# EAGLE board Modul PCB_denganJumper (EAGLE 9.6.2)
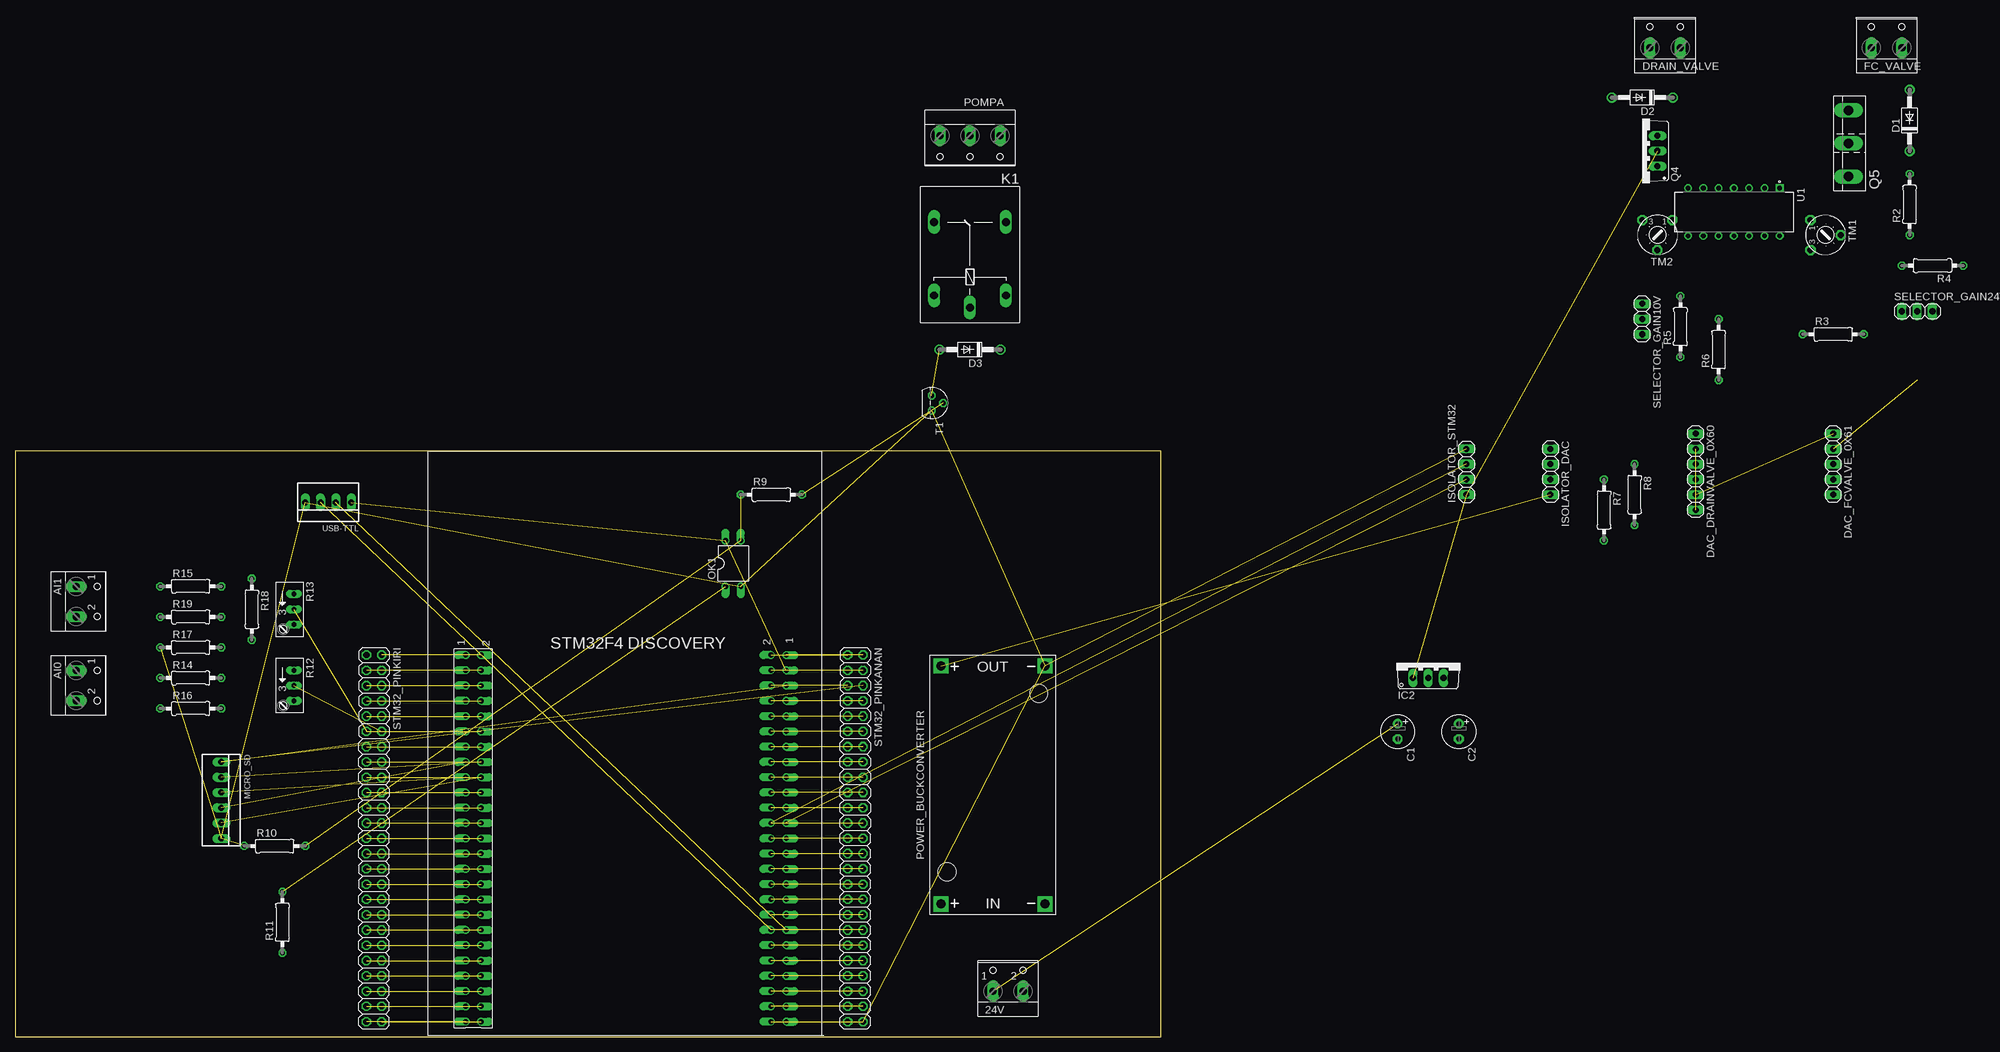
[diagram p0: board, top side]
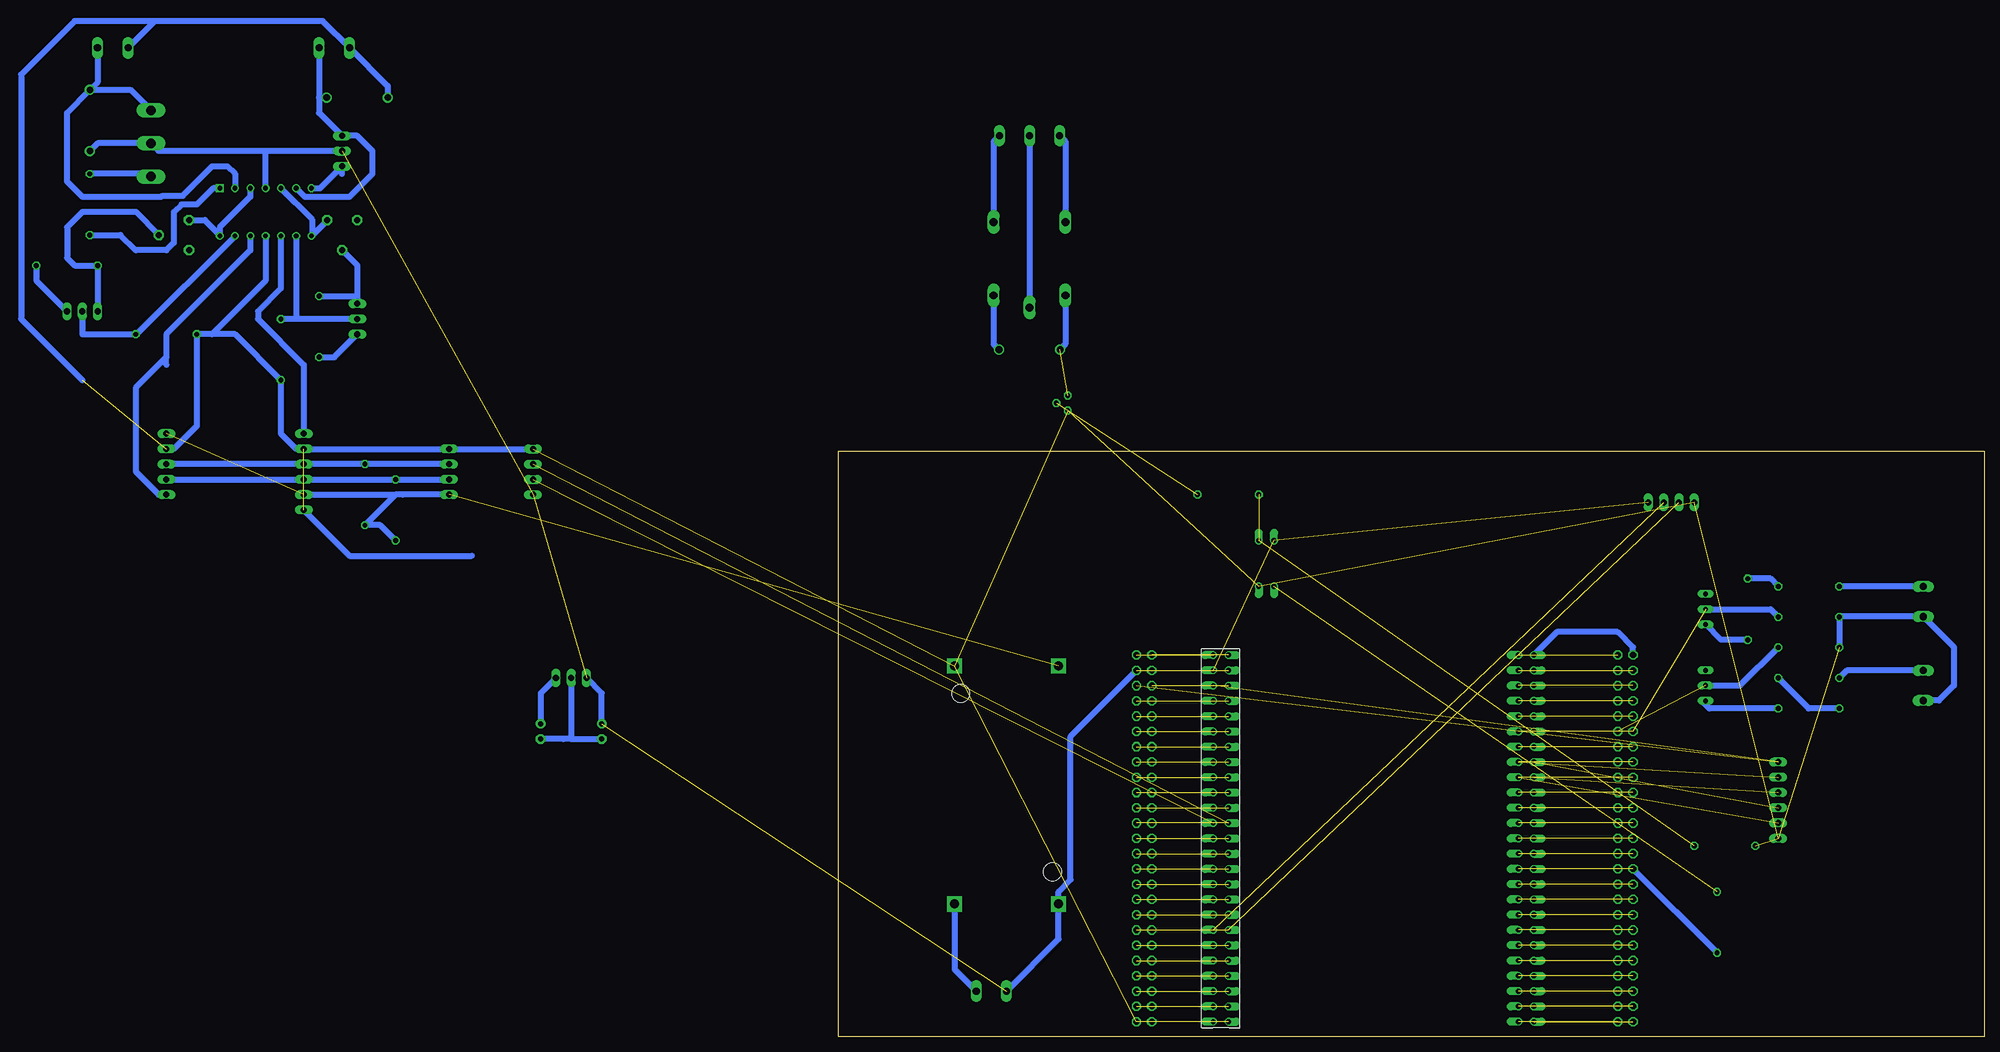
[diagram p1: board, bottom side, seen from below]

Size 190.48 x 97.46 mm. Coordinates in mm from the lower left corner, seen from the top.
Outline: 0,0 190.48,0 190.48,97.46 0,97.46 0,0
Copper layers (1*16): Top 0.035mm / dielectric 1.5mm / Bottom 0.035mm
Design rules "default": minimum track width 6mil, minimum drill 0.35mm, track to track 6mil, track to pad 6mil, pad to pad 6mil, via to via 6mil, smd to smd 6mil, copper to edge 40mil, drill to drill 6mil, minimum pad ring 10mil, minimum via ring 8mil, stop-mask expansion 4mil, vias tented up to drill 0mil, thermal gap 10mil

## Footprints (pad centres in the part's own frame; a part is rotated, then mirrored left to right if it is on the bottom)
W237-102 = drill 1.194 long: 1 -2.5,-1.27; 2 2.5,-1.27
E2,5-6 = drill 0.813 pad 1.6: + -1.27,0 | drill 0.813 pad 1.6 octagon: - 1.27,0
DO41-10 = drill 1.118: A 5.08,0; C -5.08,0
1X06 = drill 1.016 long: 1 -6.35,0; 2 -3.81,0; 3 -1.27,0; 4 1.27,0; 5 3.81,0; 6 6.35,0
1X05 = drill 1.016 long: 1 -5.08,0; 2 -2.54,0; 3 0,0; 4 2.54,0; 5 5.08,0
W237-132 = drill 1.194 long: 1 -2.54,-0.635; 2 2.54,-0.635
TO220V = drill 1.016 long: 1 -2.54,-2.54; 2 0,-2.54; 3 2.54,-2.54
1X04 = drill 1.016 long: 1 -3.81,0; 2 -1.27,0; 3 1.27,0; 4 3.81,0
G5LE = drill 1.321 long: 1 -7.493,-5.969; 2 -7.493,5.969; O 4.699,5.969; P -9.525,0; S 4.699,-5.969
22-23-2061 = drill 1 long: 1 -6.35,0; 2 -3.81,0; 3 -1.27,0; 4 1.27,0; 5 3.81,0; 6 6.35,0
DIL04 = drill 0.813 offset: 1 -1.27,-3.81; 2 1.27,-3.81; 3 1.27,3.81; 4 -1.27,3.81
W237-103 = drill 1.194 long: 1 -5,-1.29; 2 0,-1.29; 3 5,-1.29
DC-DC-STEP-DOWN-LM2596 = drill 1.5 pad 2.5 square: IN+ -19.812,8.636; IN- -19.812,-8.636; OUT+ 19.812,8.636; OUT- 19.812,-8.636 | hole 3: -14.478,7.62; 15.24,-7.62
TO220BV = drill 1.016 long: D 0,-2.54; G -2.54,-2.54; S 2.54,-2.54
TO-247AD-V = drill 1.6 long: D 0,-2.54; G -5.5,-2.54; S 5.5,-2.54
0207/10 = drill 0.813 octagon: 1 -5.08,0; 2 5.08,0
RJ9W = drill 0.813 long: A 2.54,0.635; E -2.54,0.635; S 0,0.635
1X03 = drill 1.016 long: 1 -2.54,0; 2 0,0; 3 2.54,0
2X25 = drill 1.016 octagon: 1 -30.48,-1.27; 2 -30.48,1.27; 3 -27.94,-1.27; 4 -27.94,1.27; 5 -25.4,-1.27; 6 -25.4,1.27; 7 -22.86,-1.27; 8 -22.86,1.27; 9 -20.32,-1.27; 10 -20.32,1.27; 11 -17.78,-1.27; 12 -17.78,1.27; 13 -15.24,-1.27; 14 -15.24,1.27; 15 -12.7,-1.27; 16 -12.7,1.27; 17 -10.16,-1.27; 18 -10.16,1.27; 19 -7.62,-1.27; 20 -7.62,1.27; 21 -5.08,-1.27; 22 -5.08,1.27; 23 -2.54,-1.27; 24 -2.54,1.27; 25 0,-1.27; 26 0,1.27; 27 2.54,-1.27; 28 2.54,1.27; 29 5.08,-1.27; 30 5.08,1.27; 31 7.62,-1.27; 32 7.62,1.27; 33 10.16,-1.27; 34 10.16,1.27; 35 12.7,-1.27; 36 12.7,1.27; 37 15.24,-1.27; 38 15.24,1.27; 39 17.78,-1.27; 40 17.78,1.27; 41 20.32,-1.27; 42 20.32,1.27; 43 22.86,-1.27; 44 22.86,1.27; 45 25.4,-1.27; 46 25.4,1.27; 47 27.94,-1.27; 48 27.94,1.27; 49 30.48,-1.27; 50 30.48,1.27
STM32F407VG = drill 0.8 pad 1.27 offset: 3V 50.74,55.88; 3V2 53.28,55.88; 5V 50.74,58.42; 5V2 53.28,58.42; BOOT 50.74,35.56; GND 0,60.96; GND2 2.54,60.96; GND3 0,55.88; GND4 0,33.02; GND5 0,0; GND6 2.54,0; GND7 50.74,60.96; GND8 53.28,60.96; GND9 50.74,0; GND10 53.28,0; NC 2.54,2.54; NRST 2.54,55.88; PA0 2.54,48.26; PA1 0,48.26; PA2 2.54,45.72; PA3 0,45.72; PA4 2.54,43.18; PA5 0,43.18; PA6 2.54,40.64; PA7 0,40.64; PA8 50.74,7.62; PA9 53.28,7.62; PA10 50.74,10.16; PA13 53.28,10.16; PA14 50.74,12.7; PA15 53.28,12.7; PB0 2.54,35.56; PB1 0,35.56; PB2 2.54,33.02; PB3 53.28,27.94; PB4 50.74,30.48; PB5 53.28,30.48; PB6 50.74,33.02; PB7 53.28,33.02; PB8 50.74,38.1; PB9 53.28,38.1; PB10 2.54,20.32; PB11 0,17.78; PB12 2.54,17.78; PB13 0,15.24; PB14 2.54,15.24; PB15 0,12.7; PC0 2.54,53.34; PC1 0,53.34; PC2 2.54,50.8; PC3 0,50.8; PC4 2.54,38.1; PC5 0,38.1; PC6 50.74,2.54; PC7 53.28,2.54; PC8 50.74,5.08; PC9 53.28,5.08; PC10 50.74,15.24; PC11 53.28,15.24; PC12 50.74,17.78; PC13 53.28,48.26; PC14 50.74,50.8; PC15 53.28,50.8; PD0 53.28,17.78; PD1 50.74,20.32; PD2 53.28,20.32; PD3 50.74,22.86; PD4 53.28,22.86; PD5 50.74,25.4; PD6 53.28,25.4; PD7 50.74,27.94; PD8 2.54,12.7; PD9 0,10.16; PD10 2.54,10.16; PD11 0,7.62; PD12 2.54,7.62; PD13 0,5.08; PD14 2.54,5.08; PD15 0,2.54; PE0 50.74,40.64; PE1 53.28,40.64; PE2 50.74,43.18; PE3 53.28,43.18; PE4 50.74,45.72; PE5 53.28,45.72; PE6 50.74,48.26; PE7 0,30.48; PE8 2.54,30.48; PE9 0,27.94; PE10 2.54,27.94; PE11 0,25.4; PE12 2.54,25.4; PE13 0,22.86; PE14 2.54,22.86; PE15 0,20.32; PH0 50.74,53.34; PH1 53.28,53.34; VDD 0,58.42; VDD2 2.54,58.42; VDD3 53.28,35.56
TO92 = drill 0.813 octagon: 1 1.27,0; 2 0,1.905; 3 -1.27,0
6MM = drill 1 pad 1.676 octagon: A -2.5,-2.5; E 2.5,-2.5; S 0,2.5
DIP794W45P254L1969H508Q14 = drill 0.77 pad 1.17 square: 1 -3.97,7.62 | drill 0.77 pad 1.17: 2 -3.97,5.08; 3 -3.97,2.54; 4 -3.97,0; 5 -3.97,-2.54; 6 -3.97,-5.08; 7 -3.97,-7.62; 8 3.97,-7.62; 9 3.97,-5.08; 10 3.97,-2.54; 11 3.97,0; 12 3.97,2.54; 13 3.97,5.08; 14 3.97,7.62
22-23-2041 = drill 1 long: 1 -3.81,0; 2 -1.27,0; 3 1.27,0; 4 3.81,0

## Placement (x,y rotation side)
24V  [W237-102]  165.1,8.89 0 top
AI0  [W237-102]  11.43,58.42 270 top
AI1  [W237-102]  11.43,72.39 270 top
C1  100uF  [E2,5-6]  229.87,50.8 270 top  (outside the outline)
C2  10uF  [E2,5-6]  240.03,50.8 270 top  (outside the outline)
D1  1N4004  [DO41-10]  314.96,152.4 90 top  (outside the outline)
D2  1N4004  [DO41-10]  270.51,156.21 180 top  (outside the outline)
D3  1N4004  [DO41-10]  158.75,114.3 180 top  (outside the outline)
DAC_DRAINVALVE_0X60  [1X06]  279.4,93.98 270 top  (outside the outline)
DAC_FCVALVE_0X61  [1X05]  302.26,95.25 270 top  (outside the outline)
DRAIN_VALVE  [W237-132]  274.32,165.1 0 top  (outside the outline)
FC_VALVE  [W237-132]  311.15,165.1 0 top  (outside the outline)
IC2  7812TV  [TO220V]  234.95,62.23 0 top  (outside the outline)
ISOLATOR_DAC  [1X04]  255.27,93.98 270 top  (outside the outline)
ISOLATOR_STM32  [1X04]  241.3,93.98 90 top  (outside the outline)
K1  G5L  [G5LE]  158.75,130.81 90 top  (outside the outline)
MICRO_SD  [22-23-2061]  34.29,39.37 270 top
OK1  PC817  [DIL04]  119.38,78.74 0 top
POMPA  [W237-103]  158.75,148.59 180 top  (outside the outline)
POWER_BUCKCONVERTER  DC-DC-STEP-DOWN-LM2596  [DC-DC-STEP-DOWN-LM2596]  162.56,41.91 90 top
Q4  IRF540  [TO220BV]  270.51,147.32 90 top  (outside the outline)
Q5  IRFP250  [TO-247AD-V]  302.26,148.59 90 top  (outside the outline)
R2  100R  [0207/10]  314.96,138.43 90 top  (outside the outline)
R3  1k  [0207/10]  302.26,116.84 0 top  (outside the outline)
R4  4k7  [0207/10]  318.77,128.27 180 top  (outside the outline)
R5  4k7  [0207/10]  276.86,118.11 90 top  (outside the outline)
R6  1k  [0207/10]  283.21,114.3 90 top  (outside the outline)
R7  4k6  [0207/10]  264.16,87.63 270 top  (outside the outline)
R8  4k6  [0207/10]  269.24,90.17 270 top  (outside the outline)
R9  1k  [0207/10]  125.73,90.17 0 top
R10  4k7  [0207/10]  43.18,31.75 0 top
R11  220R  [0207/10]  44.45,19.05 90 top
R12  1k  [RJ9W]  45.72,58.42 270 top
R13  1k  [RJ9W]  45.72,71.12 270 top
R14  220R  [0207/10]  29.21,59.69 0 top
R15  220R  [0207/10]  29.21,74.93 0 top
R16  1k  [0207/10]  29.21,54.61 0 top
R17  1k  [0207/10]  29.21,64.77 0 top
R18  1k  [0207/10]  39.37,71.12 270 top
R19  1k  [0207/10]  29.21,69.85 0 top
SELECTOR_GAIN10V  [1X03]  270.51,119.38 270 top  (outside the outline)
SELECTOR_GAIN24V  [1X03]  316.23,120.65 0 top  (outside the outline)
STM32_PINKANAN  [2X25]  139.7,33.02 270 top
STM32_PINKIRI  [2X25]  59.69,33.02 270 top
STM32F407VGT6_DISCOVERY_BOARD  [STM32F407VG]  74.93,2.54 0 top
T1  BC547  [TO92]  152.4,105.41 270 top  (outside the outline)
TM1  5k6  [6MM]  300.99,133.35 270 top  (outside the outline)
TM2  5k6  [6MM]  273.05,133.35 180 top  (outside the outline)
U1  LM324N  [DIP794W45P254L1969H508Q14]  285.75,137.16 270 top  (outside the outline)
USB-TTL  22-23-2041  [22-23-2041]  52.07,88.9 180 top

## Library data of the parts
24V AI0 AI1 = con-wago-500; MPN: 237-102; OC_FARNELL: unknown; OC_NEWARK: 70K9898
C1 C2 = rcl; SPICEPREFIX: C
D1-D3 = diode
DAC_DRAINVALVE_0X60 DAC_FCVALVE_0X61 ISOLATOR_DAC ISOLATOR_STM32 SELECTOR_GAIN10V SELECTOR_GAIN24V STM32_PINKANAN STM32_PINKIRI = pinhead
DRAIN_VALVE FC_VALVE = con-wago-508; OC_FARNELL: unknown; OC_NEWARK: unknown
IC2 = linear
K1 = relay; OC_FARNELL: unknown; OC_NEWARK: unknown
MICRO_SD = con-molex; MF: MOLEX; MPN: 22-23-2061; OC_FARNELL: 1462922; OC_NEWARK: 27C1933
OK1 = optocoupler; MPN: PC817X4J000F; OC_FARNELL: 9707727; OC_NEWARK: 97K7059
POMPA = con-wago-500; MPN: 237-103; OC_FARNELL: unknown; OC_NEWARK: 18M7116
POWER_BUCKCONVERTER = diy-modules
Q4 Q5 = transistor-power
R2-R11 R14-R19 = rcl; SPICEPREFIX: R
R12 R13 = pot
STM32F407VGT6_DISCOVERY_BOARD = STM32F4 DISCOVERY
T1 = transistor
TM1 TM2 = adafruit
U1 = LM324N; AVAILABILITY: In Stock; DESCRIPTION: General Purpose Amplifier 4 Circuit - 14-DIP; MF: STMicroelectronics; MP: LM324N; PACKAGE: DIP-14 STMicroelectronics; PRICE: None; PURCHASE-URL: https://pricing.snapeda.com/search/part/LM324N/?ref=eda
USB-TTL = con-molex; MF: MOLEX; MPN: 22-23-2041; OC_FARNELL: 1462920; OC_NEWARK: 38C0355

## Nets
1IN-: D1.A FC_VALVE.2 Q5.S U1.2
1OUT: R2.1 U1.1
2IN-: D2.C DRAIN_VALVE.2 Q4.S U1.6
2OUT: Q4.G U1.7
3IN+: DAC_DRAINVALVE_0X60.1 U1.10
3IN-: R6.2 SELECTOR_GAIN10V.2 U1.9
3OUT: TM2.A U1.5 U1.8
4IN+: DAC_FCVALVE_0X61.5 U1.12
4IN-: R3.2 SELECTOR_GAIN24V.2 U1.13
4OUT: TM1.A U1.3 U1.14
+3V3: MICRO_SD.1 STM32_PINKANAN.6 STM32F407VGT6_DISCOVERY_BOARD.3V2
+5V: DAC_DRAINVALVE_0X60.5 DAC_FCVALVE_0X61.1 ISOLATOR_DAC.4 POWER_BUCKCONVERTER.OUT+ R7.2 R8.2
ADC_PA0: R12.S R17.2 STM32_PINKIRI.12 STM32F407VGT6_DISCOVERY_BOARD.PA0
ADC_PA1: R13.S R19.2 STM32_PINKIRI.11 STM32F407VGT6_DISCOVERY_BOARD.PA1
GND: AI0.2 AI1.2 D2.A DAC_DRAINVALVE_0X60.2 DAC_DRAINVALVE_0X60.6 DAC_FCVALVE_0X61.2 DRAIN_VALVE.1 FC_VALVE.1 ISOLATOR_DAC.1 ISOLATOR_STM32.4 MICRO_SD.6 OK1.2 POWER_BUCKCONVERTER.OUT- R3.1 R6.1 R10.1 R17.1 R19.1 STM32_PINKANAN.50 STM32F407VGT6_DISCOVERY_BOARD.GND10 T1.1 U1.11 USB-TTL.4
GPIO_RELAY: R11.1 STM32_PINKIRI.29 STM32F407VGT6_DISCOVERY_BOARD.PE11
I2C_SCL: ISOLATOR_STM32.3 STM32_PINKANAN.23 STM32F407VGT6_DISCOVERY_BOARD.PB6
I2C_SDA: ISOLATOR_STM32.2 STM32_PINKANAN.24 STM32F407VGT6_DISCOVERY_BOARD.PB7
N$4: Q5.G R2.2
N$9: R4.1 SELECTOR_GAIN24V.3
N$10: R4.2 SELECTOR_GAIN24V.1 TM1.S
N$11: R5.2 SELECTOR_GAIN10V.1 TM2.S
N$13: R5.1 SELECTOR_GAIN10V.3
N$16: R9.2 T1.2
N$17: 24V.2 POWER_BUCKCONVERTER.IN-
N$19: DAC_DRAINVALVE_0X60.4 DAC_FCVALVE_0X61.4 ISOLATOR_DAC.3 R7.1
N$20: DAC_DRAINVALVE_0X60.3 DAC_FCVALVE_0X61.3 ISOLATOR_DAC.2 R8.1
N$21: D3.A K1.2 T1.3
N$23: OK1.3 R9.1 R10.2
N$24: K1.P POMPA.2
N$25: K1.S POMPA.1
N$26: K1.O POMPA.3
N$27: OK1.1 R11.2
N$28: AI0.1 R14.1
N$29: R14.2 R16.1
N$30: R12.A R16.2
N$31: D3.C K1.1
N$32: AI1.1 R15.1
N$33: STM32_PINKIRI.1 STM32F407VGT6_DISCOVERY_BOARD.GND
N$34: R15.2 R18.1
N$35: R13.A R18.2
N$36: C2.+ IC2.3
N$37: C1.- C2.- IC2.2
N$38: STM32_PINKIRI.3 STM32F407VGT6_DISCOVERY_BOARD.VDD
N$39: STM32_PINKIRI.5 STM32F407VGT6_DISCOVERY_BOARD.GND3
N$40: STM32_PINKIRI.7 STM32F407VGT6_DISCOVERY_BOARD.PC1
N$41: STM32_PINKIRI.9 STM32F407VGT6_DISCOVERY_BOARD.PC3
N$42: STM32_PINKIRI.13 STM32F407VGT6_DISCOVERY_BOARD.PA3
N$43: STM32_PINKIRI.19 STM32F407VGT6_DISCOVERY_BOARD.PC5
N$44: STM32_PINKIRI.21 STM32F407VGT6_DISCOVERY_BOARD.PB1
N$45: STM32_PINKIRI.23 STM32F407VGT6_DISCOVERY_BOARD.GND4
N$46: STM32_PINKIRI.25 STM32F407VGT6_DISCOVERY_BOARD.PE7
N$47: STM32_PINKIRI.27 STM32F407VGT6_DISCOVERY_BOARD.PE9
N$48: STM32_PINKIRI.31 STM32F407VGT6_DISCOVERY_BOARD.PE13
N$49: STM32_PINKIRI.33 STM32F407VGT6_DISCOVERY_BOARD.PE15
N$50: STM32_PINKIRI.35 STM32F407VGT6_DISCOVERY_BOARD.PB11
N$51: STM32_PINKIRI.37 STM32F407VGT6_DISCOVERY_BOARD.PB13
N$52: STM32_PINKIRI.39 STM32F407VGT6_DISCOVERY_BOARD.PB15
N$53: STM32_PINKIRI.41 STM32F407VGT6_DISCOVERY_BOARD.PD9
N$54: STM32_PINKIRI.43 STM32F407VGT6_DISCOVERY_BOARD.PD11
N$55: STM32_PINKIRI.45 STM32F407VGT6_DISCOVERY_BOARD.PD13
N$56: STM32_PINKIRI.47 STM32F407VGT6_DISCOVERY_BOARD.PD15
N$57: STM32_PINKIRI.49 STM32F407VGT6_DISCOVERY_BOARD.GND5
N$58: STM32_PINKIRI.50 STM32F407VGT6_DISCOVERY_BOARD.GND6
N$59: STM32_PINKIRI.48 STM32F407VGT6_DISCOVERY_BOARD.NC
N$60: STM32_PINKIRI.46 STM32F407VGT6_DISCOVERY_BOARD.PD14
N$61: STM32_PINKIRI.44 STM32F407VGT6_DISCOVERY_BOARD.PD12
N$62: STM32_PINKIRI.42 STM32F407VGT6_DISCOVERY_BOARD.PD10
N$63: STM32_PINKIRI.40 STM32F407VGT6_DISCOVERY_BOARD.PD8
N$64: STM32_PINKIRI.38 STM32F407VGT6_DISCOVERY_BOARD.PB14
N$65: STM32_PINKIRI.36 STM32F407VGT6_DISCOVERY_BOARD.PB12
N$66: STM32_PINKIRI.34 STM32F407VGT6_DISCOVERY_BOARD.PB10
N$67: STM32_PINKIRI.32 STM32F407VGT6_DISCOVERY_BOARD.PE14
N$68: STM32_PINKIRI.30 STM32F407VGT6_DISCOVERY_BOARD.PE12
N$69: STM32_PINKIRI.28 STM32F407VGT6_DISCOVERY_BOARD.PE10
N$70: STM32_PINKIRI.26 STM32F407VGT6_DISCOVERY_BOARD.PE8
N$71: STM32_PINKIRI.24 STM32F407VGT6_DISCOVERY_BOARD.PB2
N$72: STM32_PINKIRI.22 STM32F407VGT6_DISCOVERY_BOARD.PB0
N$73: STM32_PINKIRI.2 STM32F407VGT6_DISCOVERY_BOARD.GND2
N$74: STM32_PINKIRI.4 STM32F407VGT6_DISCOVERY_BOARD.VDD2
N$75: STM32_PINKIRI.6 STM32F407VGT6_DISCOVERY_BOARD.NRST
N$76: STM32_PINKIRI.8 STM32F407VGT6_DISCOVERY_BOARD.PC0
N$77: STM32_PINKIRI.10 STM32F407VGT6_DISCOVERY_BOARD.PC2
N$78: STM32_PINKIRI.14 STM32F407VGT6_DISCOVERY_BOARD.PA2
N$79: STM32_PINKIRI.20 STM32F407VGT6_DISCOVERY_BOARD.PC4
N$80: STM32_PINKANAN.1 STM32F407VGT6_DISCOVERY_BOARD.GND7
N$81: STM32_PINKANAN.3 STM32F407VGT6_DISCOVERY_BOARD.5V
N$82: STM32_PINKANAN.5 STM32F407VGT6_DISCOVERY_BOARD.3V
N$83: STM32_PINKANAN.7 STM32F407VGT6_DISCOVERY_BOARD.PH0
N$84: STM32_PINKANAN.9 STM32F407VGT6_DISCOVERY_BOARD.PC14
N$85: STM32_PINKANAN.11 STM32F407VGT6_DISCOVERY_BOARD.PE6
N$86: STM32_PINKANAN.13 STM32F407VGT6_DISCOVERY_BOARD.PE4
N$87: STM32_PINKANAN.15 STM32F407VGT6_DISCOVERY_BOARD.PE2
N$88: STM32_PINKANAN.17 STM32F407VGT6_DISCOVERY_BOARD.PE0
N$89: STM32_PINKANAN.19 STM32F407VGT6_DISCOVERY_BOARD.PB8
N$90: STM32_PINKANAN.21 STM32F407VGT6_DISCOVERY_BOARD.BOOT
N$91: STM32_PINKANAN.25 STM32F407VGT6_DISCOVERY_BOARD.PB4
N$92: STM32_PINKANAN.27 STM32F407VGT6_DISCOVERY_BOARD.PD7
N$93: STM32_PINKANAN.29 STM32F407VGT6_DISCOVERY_BOARD.PD5
N$94: STM32_PINKANAN.31 STM32F407VGT6_DISCOVERY_BOARD.PD3
N$95: STM32_PINKANAN.33 STM32F407VGT6_DISCOVERY_BOARD.PD1
N$96: STM32_PINKANAN.35 STM32F407VGT6_DISCOVERY_BOARD.PC12
N$97: STM32_PINKANAN.39 STM32F407VGT6_DISCOVERY_BOARD.PA14
N$98: STM32_PINKANAN.41 STM32F407VGT6_DISCOVERY_BOARD.PA10
N$99: STM32_PINKANAN.43 STM32F407VGT6_DISCOVERY_BOARD.PA8
N$100: STM32_PINKANAN.45 STM32F407VGT6_DISCOVERY_BOARD.PC8
N$101: STM32_PINKANAN.47 STM32F407VGT6_DISCOVERY_BOARD.PC6
N$102: STM32_PINKANAN.49 STM32F407VGT6_DISCOVERY_BOARD.GND9
N$103: STM32_PINKANAN.48 STM32F407VGT6_DISCOVERY_BOARD.PC7
N$104: STM32_PINKANAN.46 STM32F407VGT6_DISCOVERY_BOARD.PC9
N$105: STM32_PINKANAN.44 STM32F407VGT6_DISCOVERY_BOARD.PA9
N$106: STM32_PINKANAN.42 STM32F407VGT6_DISCOVERY_BOARD.PA13
N$107: STM32_PINKANAN.40 STM32F407VGT6_DISCOVERY_BOARD.PA15
N$108: STM32_PINKANAN.36 STM32F407VGT6_DISCOVERY_BOARD.PD0
N$109: STM32_PINKANAN.34 STM32F407VGT6_DISCOVERY_BOARD.PD2
N$110: STM32_PINKANAN.32 STM32F407VGT6_DISCOVERY_BOARD.PD4
N$111: STM32_PINKANAN.30 STM32F407VGT6_DISCOVERY_BOARD.PD6
N$112: STM32_PINKANAN.28 STM32F407VGT6_DISCOVERY_BOARD.PB3
N$113: STM32_PINKANAN.26 STM32F407VGT6_DISCOVERY_BOARD.PB5
N$114: STM32_PINKANAN.22 STM32F407VGT6_DISCOVERY_BOARD.VDD3
N$115: STM32_PINKANAN.20 STM32F407VGT6_DISCOVERY_BOARD.PB9
N$116: STM32_PINKANAN.2 STM32F407VGT6_DISCOVERY_BOARD.GND8
N$117: STM32_PINKANAN.8 STM32F407VGT6_DISCOVERY_BOARD.PH1
N$118: STM32_PINKANAN.10 STM32F407VGT6_DISCOVERY_BOARD.PC15
N$119: STM32_PINKANAN.12 STM32F407VGT6_DISCOVERY_BOARD.PC13
N$120: STM32_PINKANAN.14 STM32F407VGT6_DISCOVERY_BOARD.PE5
N$121: STM32_PINKANAN.16 STM32F407VGT6_DISCOVERY_BOARD.PE3
N$122: STM32_PINKANAN.18 STM32F407VGT6_DISCOVERY_BOARD.PE1
SPI_CS: MICRO_SD.2 STM32_PINKIRI.16 STM32F407VGT6_DISCOVERY_BOARD.PA4
SPI_MISO: MICRO_SD.5 STM32_PINKIRI.18 STM32F407VGT6_DISCOVERY_BOARD.PA6
SPI_MOSI: MICRO_SD.3 STM32_PINKIRI.17 STM32F407VGT6_DISCOVERY_BOARD.PA7
SPI_SCK: MICRO_SD.4 STM32_PINKIRI.15 STM32F407VGT6_DISCOVERY_BOARD.PA5
UART_RX: STM32_PINKANAN.38 STM32F407VGT6_DISCOVERY_BOARD.PC11 USB-TTL.2
UART_TX: STM32_PINKANAN.37 STM32F407VGT6_DISCOVERY_BOARD.PC10 USB-TTL.3
VCC: 24V.1 C1.+ D1.C IC2.1 ISOLATOR_STM32.1 OK1.4 POWER_BUCKCONVERTER.IN+ Q4.D Q5.D STM32_PINKANAN.4 STM32F407VGT6_DISCOVERY_BOARD.5V2 U1.4 USB-TTL.1

## Tracks (layer width: path | path; a pad name or v marks a point on that pad's centre or on a via)
1IN-
  Bottom 1.016: FC_VALVE.2 313.69,158.75 D1.A | D1.A 308.19,157.48 Q5.S | D1.A 318.77,153.67 318.77,142.24 316.23,139.7 303.11,139.7 302.92,139.89 299.53,139.89 294.64,144.78 292.1,144.78 290.83,143.51 U1.2
1OUT
  Bottom 1.016: R2.1 309.88,133.35 307.34,130.81 302.26,130.81 300.99,132.08 300.99,137.16 299.72,138.43 297.18,138.43 294.48,141.13 U1.1
2IN-
  Bottom 1.016: DRAIN_VALVE.2 276.86,156.21 | 276.86,156.21 276.86,153.67 Q4.S 270.51,149.86 267.97,147.32 267.97,143.51 271.78,139.7 279.24,139.7 U1.6 | D2.C 276.86,156.21
2OUT
  Bottom 1.016: 273.05,143.51 Q4.G 276.7,141.13 U1.7
3IN+
  Bottom 1.016: U1.10 283.21,124.46 287.02,120.65 287.02,119.38 279.4,111.76 DAC_DRAINVALVE_0X60.1
3IN-
  Bottom 1.016: SELECTOR_GAIN10V.2 280.67,119.38 | 280.67,119.38 R6.2 | U1.9 280.67,119.38
3OUT
  Bottom 1.016: U1.8 278.05,133.27 | 278.05,133.27 275.55,135.77 TM2.A | U1.5 278.05,135.97 278.05,133.27
4IN+
  Bottom 1.016: U1.12 288.29,130.81 302.26,116.84 302.26,113.03 | 302.26,111.76 302.26,113.03 | 302.26,113.03 307.34,107.95 307.34,93.98 303.53,90.17 DAC_FCVALVE_0X61.5
4IN-
  Bottom 1.016: SELECTOR_GAIN24V.2 316.23,116.84 R3.2 307.18,116.84 U1.13
4OUT
  Bottom 1.016: U1.3 288.29,139.7 293.37,134.62 293.37,133.35 | 293.37,133.35 U1.14 | TM1.A 295.87,135.85 293.37,133.35
+3V3  (2 unrouted)
+5V  (2 unrouted)
  Bottom 1.016: ISOLATOR_DAC.4 262.89,90.17 264.16,90.17 | 264.16,90.17 R8.2 266.7,85.09 R7.2 | DAC_DRAINVALVE_0X60.5 264.16,90.17
ADC_PA0  (2 unrouted)
  Bottom 1.016: R12.S 40.64,58.42 R17.2
ADC_PA1  (2 unrouted)
  Bottom 1.016: R13.S 35.56,71.12 R19.2
GND  (11 unrouted)
  Bottom 1.016: 304.17,168.91 FC_VALVE.1 | 304.17,168.91 276.23,168.91 DRAIN_VALVE.1 265.43,158.12 D2.A | 294.64,116.84 290.83,116.84 R6.1 283.21,100.33 280.67,97.79 DAC_DRAINVALVE_0X60.2 ISOLATOR_DAC.1 ISOLATOR_STM32.4 | 294.64,116.84 R3.1 297.18,101.6 300.99,97.79 DAC_FCVALVE_0X61.2 | U1.11 285.75,125.73 294.64,116.84 | 304.17,168.91 317.5,168.91 326.39,160.02 326.39,119.38 316.23,109.22 | R17.1 R19.1 24.09,69.89 AI1.2 5.08,64.81 5.08,58.42 7.58,55.92 AI0.2 | DAC_DRAINVALVE_0X60.6 271.78,80.01 251.46,80.01
GPIO_RELAY  (1 unrouted)
  Bottom 1.016: R11.1 STM32_PINKIRI.29
I2C_SCL  (2 unrouted)
I2C_SDA  (2 unrouted)
N$4
  Bottom 1.016: Q5.G 305.22,143.51 R2.2
N$9
  Bottom 1.016: R4.1 323.85,125.73 SELECTOR_GAIN24V.3
N$10
  Bottom 1.016: TM1.S 307.3,137.16 316.23,137.16 318.77,134.62 318.77,129.54 317.5,128.27 R4.2 SELECTOR_GAIN24V.1
N$11
  Bottom 1.016: TM2.S 270.51,128.31 270.51,123.19 | 270.51,123.19 SELECTOR_GAIN10V.1 | R5.2 270.51,123.19
N$13
  Bottom 1.016: R5.1 274.32,113.03 SELECTOR_GAIN10V.3
N$16  (1 unrouted)
N$17
  Bottom 1.016: POWER_BUCKCONVERTER.IN- 171.2,11.22 24V.2
N$19
  Bottom 1.016: DAC_FCVALVE_0X61.4 DAC_DRAINVALVE_0X60.4 R7.1 ISOLATOR_DAC.3
N$20
  Bottom 1.016: DAC_FCVALVE_0X61.3 DAC_DRAINVALVE_0X60.3 R8.1 ISOLATOR_DAC.2
N$21  (1 unrouted)
  Bottom 1.016: K1.2 152.78,115.19 D3.A
N$23  (2 unrouted)
N$24
  Bottom 1.016: POMPA.2 K1.P
N$25
  Bottom 1.016: POMPA.1 164.72,148.91 K1.S
N$26
  Bottom 1.016: POMPA.3 152.78,148.91 K1.O
N$27  (1 unrouted)
N$28
  Bottom 1.016: AI0.1 22.9,60.92 R14.1
N$29
  Bottom 1.016: R16.1 29.21,54.61 R14.2
N$30
  Bottom 1.016: R16.2 45.72,54.61 46.99,55.88 R12.A
N$31
  Bottom 1.016: K1.1 164.72,115.19 D3.C
N$32
  Bottom 1.016: AI1.1 10.2,74.93 R15.1
N$33
  Bottom 1.016: STM32_PINKIRI.1 58.42,64.77 60.96,67.31 71.12,67.31 STM32F407VGT6_DISCOVERY_BOARD.GND
N$34
  Bottom 1.016: R15.2 35.56,76.2 R18.1
N$35
  Bottom 1.016: R18.2 43.81,66.04 R13.A
N$36
  Bottom 1.016: IC2.3 240.03,57.15 C2.+
N$37
  Bottom 1.016: IC2.2 234.95,49.53 | 234.95,49.53 236.22,49.53 C2.- | 234.95,49.53 C1.-
N$38  (1 unrouted)
N$39  (1 unrouted)
N$40  (1 unrouted)
N$41  (1 unrouted)
N$42  (1 unrouted)
N$43  (1 unrouted)
N$44  (1 unrouted)
N$45  (1 unrouted)
N$46  (1 unrouted)
N$47  (1 unrouted)
N$48  (1 unrouted)
N$49  (1 unrouted)
N$50  (1 unrouted)
N$51  (1 unrouted)
N$52  (1 unrouted)
N$53  (1 unrouted)
N$54  (1 unrouted)
N$55  (1 unrouted)
N$56  (1 unrouted)
N$57  (1 unrouted)
N$58  (1 unrouted)
N$59  (1 unrouted)
N$60  (1 unrouted)
N$61  (1 unrouted)
N$62  (1 unrouted)
N$63  (1 unrouted)
N$64  (1 unrouted)
N$65  (1 unrouted)
N$66  (1 unrouted)
N$67  (1 unrouted)
N$68  (1 unrouted)
N$69  (1 unrouted)
N$70  (1 unrouted)
N$71  (1 unrouted)
N$72  (1 unrouted)
N$73  (1 unrouted)
N$74  (1 unrouted)
N$75  (1 unrouted)
N$76  (1 unrouted)
N$77  (1 unrouted)
N$78  (1 unrouted)
N$79  (1 unrouted)
N$80  (1 unrouted)
N$81  (1 unrouted)
N$82  (1 unrouted)
N$83  (1 unrouted)
N$84  (1 unrouted)
N$85  (1 unrouted)
N$86  (1 unrouted)
N$87  (1 unrouted)
N$88  (1 unrouted)
N$89  (1 unrouted)
N$90  (1 unrouted)
N$91  (1 unrouted)
N$92  (1 unrouted)
N$93  (1 unrouted)
N$94  (1 unrouted)
N$95  (1 unrouted)
N$96  (1 unrouted)
N$97  (1 unrouted)
N$98  (1 unrouted)
N$99  (1 unrouted)
N$100  (1 unrouted)
N$101  (1 unrouted)
N$102  (1 unrouted)
N$103  (1 unrouted)
N$104  (1 unrouted)
N$105  (1 unrouted)
N$106  (1 unrouted)
N$107  (1 unrouted)
N$108  (1 unrouted)
N$109  (1 unrouted)
N$110  (1 unrouted)
N$111  (1 unrouted)
N$112  (1 unrouted)
N$113  (1 unrouted)
N$114  (1 unrouted)
N$115  (1 unrouted)
N$116  (1 unrouted)
N$117  (1 unrouted)
N$118  (1 unrouted)
N$119  (1 unrouted)
N$120  (1 unrouted)
N$121  (1 unrouted)
N$122  (1 unrouted)
SPI_CS  (2 unrouted)
SPI_MISO  (2 unrouted)
SPI_MOSI  (2 unrouted)
SPI_SCK  (2 unrouted)
UART_RX  (2 unrouted)
UART_TX  (2 unrouted)
VCC  (6 unrouted)
  Bottom 1.016: D1.C 313.69,148.59 Q5.D 303.53,147.32 285.75,147.32 | Q4.D 285.75,147.32 | U1.4 285.75,147.32 | C1.+ 229.87,57.15 IC2.1 | 24V.1 153.92,16.3 POWER_BUCKCONVERTER.IN+ 153.92,24.17 151.92,26.18 151.92,50.01 STM32_PINKANAN.4